# Altium PCB nRF-Intro-PCB.PcbDoc (part 2 of 2)
Units mil, origin at the board's own origin, x right, y up, seen from the top; angles counter-clockwise.
Board outline 1445.74 x 1165.1 mil, 6 copper layers (Top Layer, L2, L3, L4, L5, Bottom Layer), stack 61.312 mil thick; 53 components, 64 nets, 253 pads, 226 vias.
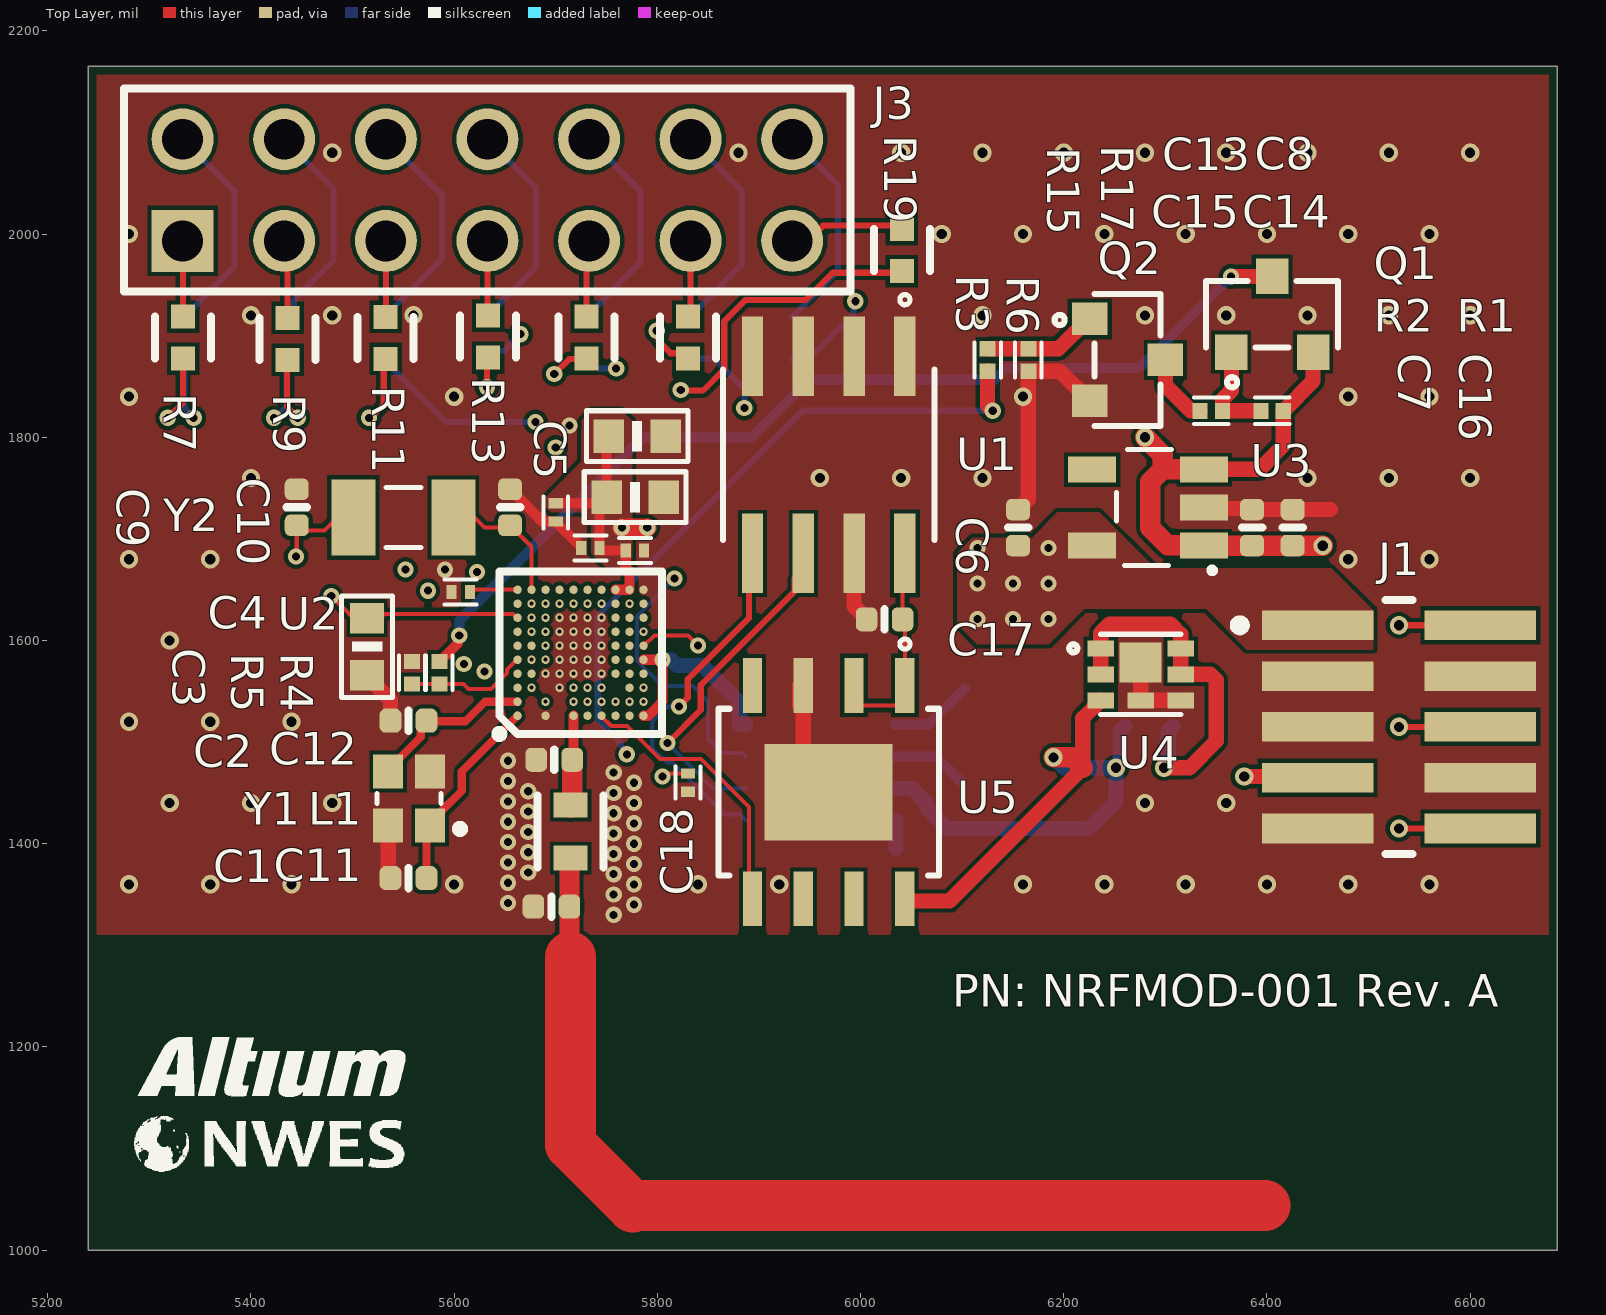
[diagram p0: Top Layer view]

## Via types
v1: diameter 18, hole 10, Top Layer to Bottom Layer, tented both sides, 73 vias
v2: diameter 16, hole 8, Top Layer to Bottom Layer, tented both sides, 72 vias
v3: diameter 8, hole 4, Top Layer to L2, tented both sides, 49 vias
v4: diameter 8, hole 4, L2 to L3, tented both sides, 32 vias

## Nets (pads, with @x,y where several pads share a name; then routed paths per layer and width w, separated by ;. In a path a pad name is that pad's centre, name@x,y a point inside that pad or via, vN(x,y) a via of type N, cw(c..) or ccw(c..) an arc to the next point about the centre after c; other vN are vias at no path point) (continued)
VREAD: (continued)
  Top Layer w4: R5.2 5558.65,1557.21 5609.06,1557.21 5614.15,1552.13 5636.52,1552.13 5652.25,1567.86 5652.25,1571.52 5661.82,1581.09 U2.A5
pads on no net: J2.S1 J2.S2 U2.A9 U2.B6 U2.C10 U2.D10 U2.E10 U2.F1 U2.H1 U2.H4 U2.H5 U2.H6 U2.H7 U2.H8 U2.H9 U2.J1 U2.J3 U2.J4 U2.J5 U2.J6 U2.J7 U2.J8 U2.K4 U2.K8 U2.K9 U3.4 U5.4 U5.6 U5.7

## Polygon pours and split planes (outlines as drawn)
GND on Top Layer "NONET_L-01_P-001" (solid, remove dead copper, pour order 17): 5757.84,1310.37 5240,1310.37 5240,2165.1 6685.89,2165.1 6685.89,1310.37
VDD1 on Top Layer "NONET_L-01_P-001" (solid, pour order 4): 5775.1,1711.09 5775.1,1731.09 5775.1,1816.09 5765.1,1826.09 5735.1,1826.09 5725.1,1816.09 5725.1,1776.09 5690.1,1741.09 5690.1,1731.09 5695.1,1726.09 5725.1,1726.09 5735.1,1716.09 5735.1,1686.09 5750.1,1671.09 5765.1,1671.09 5775.1,1681.09 5775.1,1696.09
VDD1 on Top Layer "Top Layer-VDD1" (solid, pour order 6): 6220.1,1631.09 6340.1,1631.09 6380.1,1591.09 6504.8,1591.09 6504.8,1629.57 6463.28,1671.09 6290.1,1671.09 6235.1,1726.09 6193.85,1726.09 6168.85,1701.09 6110.1,1701.09 6095.1,1686.09 6095.1,1616.09 6115.1,1596.09 6185.1,1596.09
GND on L3 "NONET_L-01_P-001" (solid, remove dead copper, pour order 13): 5757.84,1310.37 5240,1310.37 5240,2165.1 6685.89,2165.1 6685.89,1310.37
VDD1 on L3 "Layer 1-VDD1" (solid, pour order 3): 5775.1,1651.09 5775.1,1591.09 5795.1,1571.09 5810.1,1571.09 5845.1,1606.09 5890.1,1606.09 6195.1,1606.09 6225.1,1636.09 6225.1,1686.09 6185.1,1726.09 5815.1,1726.09 5790.1,1751.09 5755.1,1751.09 5730.1,1726.09 5730.1,1696.09
GND on L2 "NONET_L-01_P-001" (solid, remove dead copper, pour order 12): 5757.84,1310.37 5240,1310.37 5240,2165.1 6685.89,2165.1 6685.89,1310.37
GND on L4 "NONET_L-01_P-001" (solid, remove dead copper, pour order 14): 5757.84,1310.37 5240,1310.37 5240,2165.1 6685.89,2165.1 6685.89,1310.37
GND on L5 "NONET_L-01_P-001" (solid, remove dead copper, pour order 15): 5757.84,1310.37 5240,1310.37 5240,2165.1 6685.89,2165.1 6685.89,1310.37
GND on Bottom Layer "NONET_L-01_P-001" (solid, remove dead copper, pour order 16): 5757.84,1310.37 5240,1310.37 5240,2165.1 6685.89,2165.1 6685.89,1310.37

## Other copper
L2:
  pour cut-out: 5682.06,1447.83 5682.06,1494.94 5744.29,1494.94 5747.02,1494.94 5747.02,1376.96 5747.02,1310.51 5682.06,1310.51
L3:
  pour cut-out: 5682.06,1447.83 5682.06,1494.94 5744.29,1494.94 5747.02,1494.94 5747.02,1376.96 5747.02,1310.51 5682.06,1310.51
L4:
  pour cut-out: 5682.06,1447.83 5682.06,1494.94 5744.29,1494.94 5747.02,1494.94 5747.02,1376.96 5747.02,1310.51 5682.06,1310.51
L5:
  pour cut-out: 5682.06,1447.83 5682.06,1494.94 5744.29,1494.94 5747.02,1494.94 5747.02,1376.96 5747.02,1310.51 5682.06,1310.51

## Silkscreen, mask and mechanical layers (free items; w line width, h text height)
Top Overlay:
  drawing of 21 lines, arcs and shapes, not listed
  text "PN: NRFMOD-001 Rev. A" at 6090.53,1239.68 h32
Top Solder:
  lines w8: 5713.52,1383.45 5714.04,1383.98
  lines w10: 5717.54,1480.88 5717.54,1525.97
  lines w20: 5713.52,1289.03 5713.52,1338.08 5713.52,1383.45 ; 5714.47,1435.48 5716.28,1437.29 5716.28,1482.62
  lines w50: 5714.47,1288.39 5714.47,1103.78 5775.86,1042.39 ; 5774.45,1043.82 6398.13,1043.82

## Text inside footprints (layer, text, board x,y; h text height)
J2: Bottom Overlay "-" at 6328.63,1504.98 h60 r180; Bottom Overlay "+" at 6211.65,1511.71 h60 r180